# Altium PCB MUSB-05-X-B-SM-A.PcbDoc
Units mil, origin at the board's own origin, x right, y up, seen from the top; angles counter-clockwise.
Board outline 551.18 x 590.55 mil, 2 copper layers (Top, Bottom), stack 12.7 mil thick; 1 components, 0 nets, 11 pads, 0 vias.
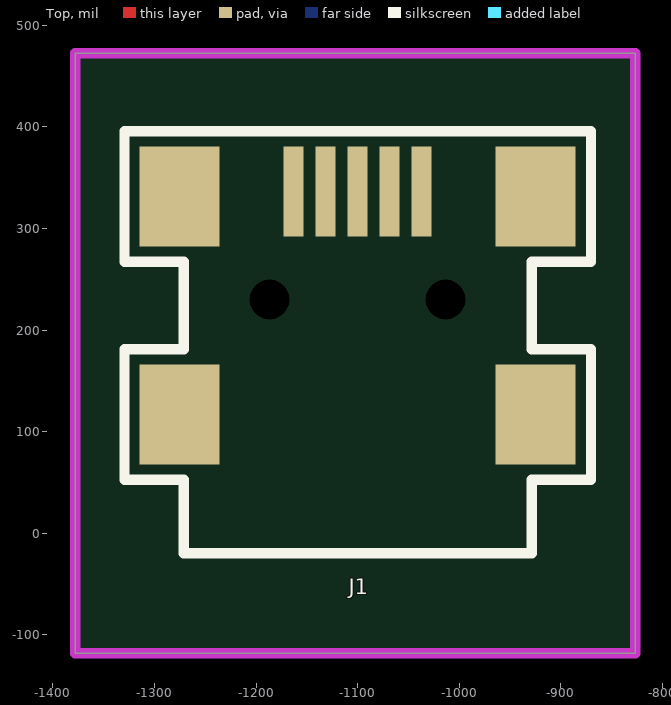
[diagram p0: Top view]
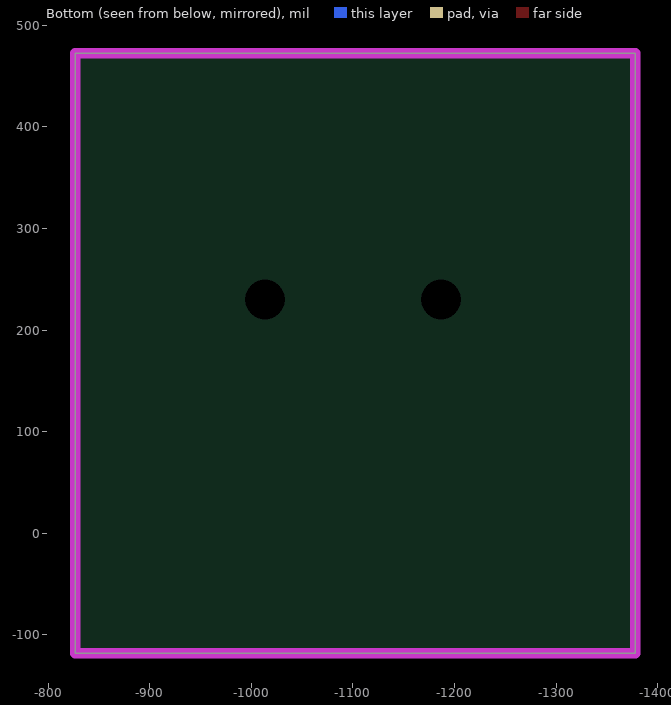
[diagram p1: Bottom view, seen from below]

## Layer stack, top to bottom
Top: signal copper 1.35
Dielectric: dielectric 10, FR-4, Dk 4.3
Bottom: signal copper 1.35

## Board outline
-1377.95,472.44 -826.77,472.44 -826.77,-118.11 -1377.95,-118.11

## Design rules (kind name [scope] priority, off if disabled: settings)
Clearance "'Default' PADS rule_18" [All] p1: gap=6
Clearance "'Default' PADS rule_15" [IsVia vs IsVia] p2: gap=6
ComponentClearance "'Default' PADS rule_12" [All] p1: gap=6 collisioncheckmode=3 verticalgap=10 showdistances=FALSE
FlightTimeFalling "'Default' PADS rule_10" [All] p1: maximum=10.00
FlightTimeRising "'Default' PADS rule_9" [All] p1: maximum=10.00
Length "'Default' PADS rule_5" [All] p1: maxlimit=50000 minlimit=0
MatchedLengths "'Default' PADS rule_11" [InNetClass('All Nets')] p1: tolerance=200 checknetsindiffpair=TRUE checkdiffpairvsdiffpair=TRUE checkothers=TRUE
MaxMinImpedance "'Default' PADS rule_8" [All] p1: minimum=50.00 maximum=150.0
ParallelSegment "'Default' PADS rule_7" [All] p1: limit=1000 gap=200
ParallelSegment "'Default' PADS rule_6" [All] p2: limit=1000 gap=200
PlaneClearance "'Default' PADS rule_14" [All] p1: clearance=6
PlaneConnect "Power Plane Connect Style - pads with no thermal" [(Name='J1-6') Or (Name='J1-7')] p1: planeconnectstyle=NoConnect reliefexpansion=20 reliefentries=4 reliefconductorwidth=10 reliefairgap=10 // PAD - No Thermal Connect Rule
PlaneConnect "Power Plane Connect Style - from global settings" [All] p2: planeconnectstyle=Relief reliefexpansion=20 reliefentries=2 reliefconductorwidth=15 reliefairgap=10
PolygonConnect [All] p1: connectstyle=Relief reliefconductorwidth=10 reliefentries=4 polygonreliefangle="90 Angle"
RoutingLayers "'Default' PADS rule_3" [All] p1: top layer_v5=TRUE bottom layer_v5=TRUE
RoutingPriority "'Default' PADS rule_2" [All] p1: routingpriority=3
RoutingTopology "'Default' PADS rule" [All] p1: topology=Shortest
RoutingVias "'Default' PADS rule_4" [All] p1: holewidth=37 width=55 viastyle="Through Hole" minholewidth=37 minwidth=55 maxholewidth=37 maxwidth=55
SMDToCorner "'Default' PADS rule_16" [All] p1: distance=60000
SMDToPlane "'Default' PADS rule_17" [All] p1: distance=60000
SilkscreenOverComponentPads [All] p1: minsilkscreentomaskgap=10
SolderMaskExpansion [All] p1: expansion=4
Width "'Default' PADS rule_13" [All] p1: maxlimit=12 minlimit=12 preferedwidth=12
21 further rules are at their usual default settings.

## Components (designator, comment, footprint, x,y, rotation, side; value= is the part's Value field where it differs from the comment)
J1 "MUSB-05-X-B-SM-A" MUSB-05-X-B-SM-A -1100,0 r0 top

## Footprints (in the part's own frame and the unit in brackets; to place one, negate y for a bottom-side part, rotate by r counter-clockwise, add the part's x,y. Pads: shape width x height; smd on the part's side, far side on the other; paste and mask are expansions set on the pad)
MUSB-05-X-B-SM-A [mm]
  rect 0.5x2.25 smd mask+0.05: 1(-1.6,8.545) 2(-0.8,8.545) 3(0,8.545) 4(0.8,8.545) 5(1.6,8.545)
  round 0.5 hole 1 unplated mask+0.5: 6(-2.2,5.85) 7(2.2,5.85)
  rect 2x2.5 smd mask+0.05: 8(-4.45,2.97) 9(4.45,2.97) 10(-4.45,8.42) 11(4.45,8.42)
  silkscreen extent -5.83,-0.5 5.83,10.05

## Nets (pads, with @x,y where several pads share a name; then routed paths per layer and width w, separated by ;. In a path a pad name is that pad's centre, name@x,y a point inside that pad or via, vN(x,y) a via of type N, cw(c..) or ccw(c..) an arc to the next point about the centre after c; other vN are vias at no path point)
pads on no net: J1.1 J1.2 J1.3 J1.4 J1.5 J1.6 J1.7 J1.8 J1.9 J1.10 J1.11

## Keep-outs
Keep-Out Layer:
  the board outline again, w10